# Allegro board ZB_TLSR8258_V101.brd
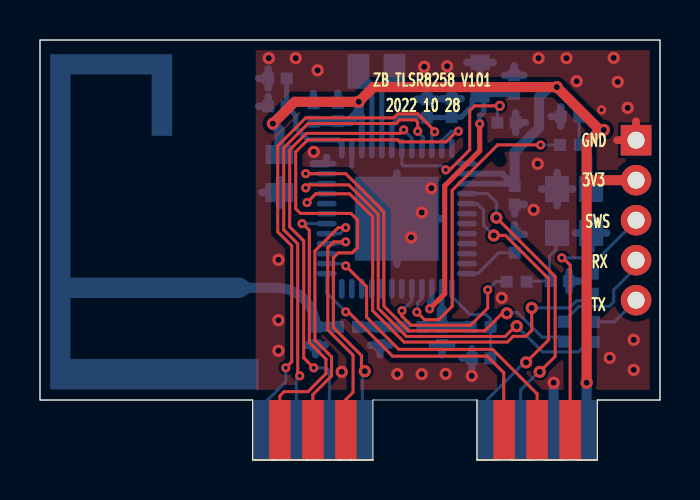
[diagram p0: board, top side]
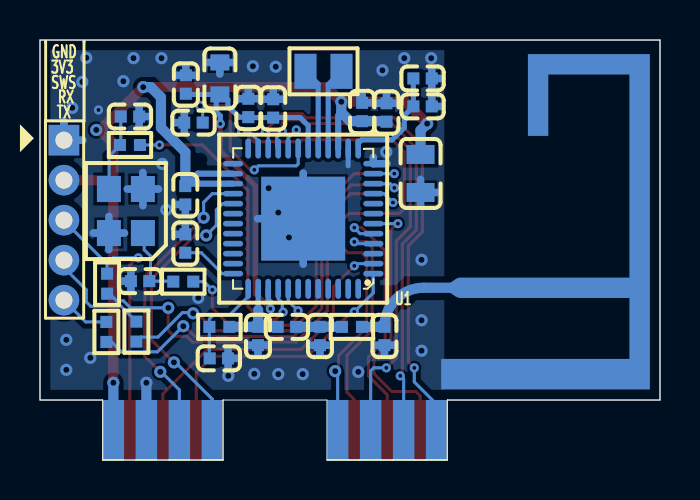
[diagram p1: board, bottom side, seen from below]

Outline 31 x 21 mm; copper layers: TOP, BOTTOM. Coordinates in mm from the lower left corner of the outline.
Outline path: 0,21 0,3 ; 0,21 31,21 ; 0,21 0,3 ; 0,21 31,21 ; 0,3 10.63,3 ; 0,3 10.63,3 ; 31,21 31,3 ; 31,21 31,3 ; 10.63,3 10.63,0 ; 10.63,3 10.63,0 ; 10.63,0 11.7,0 ; 10.63,0 11.7,0 ; 10.63,0 16.65,0 ; 11.7,0 12.28,0 ; 11.7,0 12.28,0 ; 12.28,0 13.35,0 ; 12.28,0 13.35,0 ; 13.35,0 13.93,0 ; 13.35,0 13.93,0 ; 13.93,0 15,0 ; 13.93,0 15,0 ; 15,0 15.58,0 ; 15,0 15.58,0 ; 15.58,0 16.65,0 ; 15.58,0 16.65,0 ; 16.65,0 16.65,3 21.85,3 ; 21.85,3 21.85,0 ; 21.85,3 21.85,0 ; 21.85,0 22.92,0 ; 21.85,0 27.87,0 ; 21.85,0 27.87,0 ; 27.87,0 26.8,0 ; 27.87,0 27.87,3 ; 27.87,0 27.87,3 ; 23.5,0 24.57,0 ; 25.15,0 26.22,0 ; 27.87,3 31,3 ; 27.87,3 31,3

## Placement (name value [footprint] x y rotation side)
C1  103  [C0402]  23.71 18.77 270 bottom
C2  2.2uF/10V  [C0603]  22.01 19.08 90 bottom
C3  12pF/50V  [C0402]  26.5 17.17 180 bottom
C4  12pF/50V  [C0402]  25.99 8.94 0 bottom
C5  1.2pF/NP0/50V  [C0402]  20.1 6.2 270 bottom
C6  1.8pF/NP0/50V  [C0402]  17 6.2 270 bottom
C7  1pF/NP0/50V  [C0402]  13.78 6.2 90 bottom
C8  220pF/NP0/50V  [C0402]  18.65 6.66 0 bottom
C9  18pF/NP0/50V  [C0402]  22.06 5.08 0 bottom
C10  105  [C0402]  23.73 10.82 90 bottom
C11  100pF  [C0402]  14.89 17.4 90 bottom
C12  104  [C0402]  13.67 17.38 90 bottom
C13  10uF/16V  [C0805]  11.97 14.33 270 bottom
C14  105  [C0402]  11.87 19.08 180 bottom
C15  103  [C0402]  11.87 17.68 0 bottom
C16  104  [C0402]  23.73 13.24 270 bottom
C17  104  [C0402]  20.58 17.6 90 bottom
C18  105  [C0402]  19.34 17.58 270 bottom
C19  105  [C0402]  23.33 16.87 180 bottom
J1  VCC3V3  [ZB_PIN1]  27.33 1.5 180 bottom
J2  GND  [ZB_PIN1]  25.68 1.5 180 bottom
J3  PWM1  [ZB_PIN1]  24.03 1.5 180 bottom
J4  PWM2  [ZB_PIN1]  22.38 1.5 180 bottom
J5  ZB_CONFIG  [ZB_PIN1]  16.12 1.5 180 bottom
J6  I/O1  [ZB_PIN1]  14.47 1.5 180 bottom
J7  I/O2  [ZB_PIN1]  12.82 1.5 180 bottom
J8  I/O3  [ZB_PIN1]  11.17 1.5 180 bottom
J9  I/O4  [ZB_PIN1]  11.99 1.5 0 top
J10  I/O5  [ZB_PIN1]  13.64 1.5 0 top
J11  I/O6  [ZB_PIN1]  15.29 1.5 0 top
J12  TX  [ZB_PIN1]  23.21 1.5 0 top
J13  RX  [ZB_PIN1]  24.86 1.5 0 top
J14  SWS  [ZB_PIN1]  26.51 1.5 0 top
J15  -  [SIP5_PH200]  29.8 11.99 270 bottom
L1  47uH  [L0806]  16.82 19.43 180 bottom
NOREF  -  []  31 3 90 top
NOREF#2  -  []  0 21 0 top
NOREF#3  -  []  27.87 0 90 top
R1  0  [R0402]  26.5 15.75 180 bottom
R2  0  [R0402]  23.83 8.92 0 bottom
R3  3.3nH  [R0402]  15.4 6.66 0 bottom
R4  1.3nH  [R0402]  22.03 6.66 180 bottom
R6  100R  [R0402]  27.64 8.82 270 bottom
R7  100R  [R0402]  26.18 6.42 270 bottom
R8  100R  [R0402]  27.68 6.4 270 bottom
U1  TLSR8258F512ET48  [ZB_QFN_7X7_48PIN_0P5_4P20X4P20]  17.84 12.07 0 bottom
Y1  24M_3225  [Y_SMCE3225]  26.7 12.45 90 bottom

## Library data of the parts
C1-C10 C12-C19 = C: room: ZB02
C11 = C: room: PWR
J1-J14 = JAC_1P-39008278002
J15 = JH4S_PH254_TJC3-4A_10: Tolerance: RichardLC
L1 = L: room: ZB02
R1-R4 = R: room: ZB02
R6-R8 = R
U1 = TLSR8258F512ET48: room: ZB02
Y1 = 24M_3225: room: ZB02

## Footprints (pads in the part's own frame, mm; a bottom-side part is the same pattern mirrored in y, then rotated)
C0402
  rect 0.6x0.6 smd: 1(-0.46,0) 2(0.46,0)
C0603
  rect 0.8x0.95 smd: 1(-0.8,0) 2(0.8,0)
C0805
  rect 0.95x1.4 smd: 1(-0.95,0) 2(0.95,0)
L0806
  rect 1.1x1.75 smd: 1(-0.9,0) 2(0.9,0)
R0402
  rect 0.6x0.6 smd: 1(-0.5,0) 2(0.5,0)
SIP5_PH200
  rect 1.53x1.53 hole 0.85: 1(-4,0)
  round 1.53 hole 0.85: 2(-2,0) 3(0,0) 4(2,0) 5(4,0)
Y_SMCE3225
  rect 1.3x1.2 smd: 1(-1.1,-0.85) 2(1.1,-0.85) 3(1.1,0.85) 4(-1.1,0.85)
ZB_PIN1
  rect 1.07x3 smd: 1(0,0)
ZB_QFN_7X7_48PIN_0P5_4P20X4P20
  oval 1x0.28 smd: 1(-3.507,2.75) 2(-3.507,2.25) 3(-3.507,1.75) 4(-3.507,1.25) 5(-3.507,0.75) 6(-3.507,0.25) 7(-3.507,-0.25) 8(-3.507,-0.75) 9(-3.507,-1.25) 10(-3.507,-1.75) 11(-3.507,-2.25) 12(-3.507,-2.75) 25(3.507,-2.75) 26(3.507,-2.25) 27(3.507,-1.75) 28(3.507,-1.25) 29(3.507,-0.75) 30(3.507,-0.25) 31(3.507,0.25) 32(3.507,0.75) 33(3.507,1.25) 34(3.507,1.75) 35(3.507,2.25) 36(3.507,2.75)
  oval 0.28x1 smd: 13(-2.75,-3.507) 14(-2.25,-3.507) 15(-1.75,-3.507) 16(-1.25,-3.507) 17(-0.75,-3.507) 18(-0.25,-3.507) 19(0.25,-3.507) 20(0.75,-3.507) 21(1.25,-3.507) 22(1.75,-3.507) 23(2.25,-3.507) 24(2.75,-3.507) 37(2.75,3.507) 38(2.25,3.507) 39(1.75,3.507) 40(1.25,3.507) 41(0.75,3.507) 42(0.25,3.507) 43(-0.25,3.507) 44(-0.75,3.507) 45(-1.25,3.507) 46(-1.75,3.507) 47(-2.25,3.507) 48(-2.75,3.507)
  rect 4.2x4.2 smd: 49(0,0)

## Nets
GND: C1.1 C2.2 C3.2 C4.2 C5.2 C6.2 C7.1 C9.1 C10.2 C11.2 C12.2 C13.2 C14.2 C15.1 C16.2 C17.2 C18.1 C19.1 J2.1 J15.1 U1.12(DVSS#12) U1.14(DVSS#14) U1.49(GND) Y1.2 Y1.4
VCC3V3: C11.1 C12.1 C13.1 C16.1 J1.1 J15.2 U1.15(VDD_IO) U1.26(VDD3) U1.27(VDDIO_AMS)
VDDA1V2: C1.2 C2.1 C17.1 C18.2 U1.18(VDD1V2) U1.39(AVDD1V2)
/M4_RST: C10.1 U1.36(RESETB)
I/O1: J6.1 U1.20(P5/UCTS/CYC2LNA/B[2])
I/O2: J7.1 U1.21(P0N/URTS/CYC2PA/B[3])
I/O3: J8.1 U1.22(SDMP0/P4/B[4])
I/O4: J9.1 U1.6(CK/URTS/P2/A[4])
I/O5: J10.1 U1.5(DI/UCTS/P1/A[3])
I/O6: J11.1 U1.4(DO/UTX/P0/A[2])
PWM1: J3.1 U1.28(I2CSDA/P4N/URTS/PGAP0/C[0])
PWM2: J4.1 U1.29(I2CCK/P1N/P0/PGAN0/C[1])
RX: J13.1 U1.2(DMIC_DI/P0N/URX/A[0])
SWS: R6.2 U1.9(SWS/URTS/A[7])
SWS_DEBUG: J14.1 J15.3 R6.1
TX: J12.1 U1.1(CK/I2SBCK/7816TRX/D[7])
UART0_RX: R7.2 U1.11(P4/UTX/ATSEL2/B[1])
UART0_TX: R8.2 U1.10(P3/URX/ATSEL1/B[0])
XTAL1: R2.1 U1.41(XC2)
XTAL2: R1.2 U1.40(XC1)
ZB_CONFIG: J5.1 U1.23(SDMN0/P5/B[5])
N76682: C19.2 U1.19(VDD_F)
N76758: L1.1 U1.17(VDCDC)
N76762: L1.2 U1.16(VDCDC_SW)
N76792: C6.1 C8.1 R3.2
N76796: C5.1 C8.2 R4.2 U1.38(ANT)
N76808: C9.2 R4.1 U1.37(VANT)
N76860: C7.2 R3.1
N77656: C14.1 C15.2 U1.13(VDD1V)
N79833: C4.1 R2.2 Y1.1
N79893: C3.1 R1.1 Y1.3
N104826: J15.4 R7.1
N104836: J15.5 R8.1

Pads without a net: U1 3 7 8 24 25 30 31 32 33 34 35 42 43 44 45 46 47 48

## Via types
v1: diameter 0.457, hole 0.203, TOP to BOTTOM, 24 vias
v2: diameter 0.61, hole 0.305, TOP to BOTTOM, 43 vias
v3: diameter 0.508, hole 0.254, TOP to BOTTOM, 1 via

## Routing (per net, layer and track width the routed paths; a pad name or vN(x,y) marks a point on that pad's centre or on a via; arc(x,y) is an arc through that point)
GND: length 47.6
  TOP w0.381: 29.8,16.93 J15.1 28.86,15.99
  BOTTOM w0.254: U1.14 15.59,14.71
  BOTTOM w0.381: 25.08,13.55 Y1.2 ; Y1.2 25.86,14.38 ; Y1.2 26.63,13.55 ; Y1.2 25.86,12.72 ; 11.41,18.6 C14.2 ; C14.2 11.41,19.56 ; C14.2 10.93,19.08 ; 25.56,17.17 C3.2 ; C3.2 26.04,16.69 ; C3.2 26.04,17.65 ; C4.2 26.45,9.42 ; C4.2 26.45,8.46 ; C4.2 26.93,8.94 ; 13.2,17.84 C12.2 ; C12.2 14.15,17.84 ; C12.2 13.67,18.31 ; 18.86,18.04 C18.1 ; C18.1 19.82,18.04 ; C18.1 19.34,18.52 ; 21.12,5.08 C9.1 ; C9.1 21.6,5.56 ; C9.1 21.6,4.6 ; 14.89,18.34 C11.2 14.42,17.86 ; C19.1 24.26,16.87 ; C19.1 23.79,16.39 ; C19.1 23.79,17.35 ; 16.52,5.74 C6.2 ; C6.2 17,5.26 ; C6.2 17.48,5.74 ; 21.35,19.88 C2.2 ; C2.2 22.01,19.3 ; C2.2 22.66,19.88 ; 23.73,12.3 C16.2 24.21,12.78 ; 13.78,5.26 C7.1 ; C7.1 13.3,5.74 ; C7.1 14.25,5.74 ; 11.41,18.16 C15.1 10.93,17.68 ; C17.2 20.58,18.54 ; C17.2 20.11,18.06 ; C17.2 21.06,18.06 ; 13.66,14.82 U1.12 14.33,15.14 ; C1.1 24.19,19.23 ; C1.1 23.23,19.23 ; C1.1 23.71,19.71 ; C13.2 11.97,14.03 ; C13.2 11.1,13.38 ; C13.2 11.97,12.72 ; 26.78,11.35 Y1.4 ; Y1.4 27.55,10.52 ; Y1.4 27.55,12.18 ; Y1.4 28.33,11.35 ; U1.49 20.12,12.07 ; U1.49 17.84,14.35 ; U1.49 17.84,9.79 ; 28.86,15.99 J15.1 29.8,16.93 ; 20.1,5.26 C5.2 ; C5.2 19.62,5.74 ; C5.2 20.58,5.74 ; 23.73,11.76 C10.2 24.21,11.28
  BOTTOM w0.508: 10.5,8.61 11.8,8.61 ; J2.1 v2(25.68,3.86)
  vias: v1(28.08,17.5) v2(11.44,20.09) v2(11.92,10.01) v2(11.92,6.99) v2(11.92,5.46) v2(12.79,20.09) v2(13.69,15.41) v2(13.88,19.48) v2(15.09,4.41) v2(17.87,4.29) v2(18.55,11.13) v2(19.09,12.37) v2(19.08,4.29) v2(19.21,19.66) v2(19.57,13.59) v2(20.29,4.31) v2(20.36,19.69) v2(21.59,4.21) v2(23.09,8.11) v2(24.69,12.51) v2(24.93,20.09) v2(24.89,14.81) v2(26.32,20.09) v2(26.83,18.94) v2(28.49,5.11) v2(28.69,20.11) v2(28.89,18.91) v2(29.39,17.61) v2(29.69,6.01) v2(29.69,4.51)
VCC3V3: length 53.4
  TOP w0.508: 27.33,13.96 v2(27.33,3.86) ; 27.33,13.96 27.36,13.99 J15.2 ; 27.33,13.96 27.33,15.83 28.01,16.5 ; v2(11.64,16.82) 12.74,17.91 v2(15.94,17.91) 16.67,18.65 v2(25.84,18.65) 27.98,16.5 28.01,16.5 ; 28.01,16.5 v2(28.19,16.5)
  BOTTOM w0.305: U1.15 16.09,17.22 15.94,17.37 ; U1.26 23.11,14.32 23.61,13.82 ; U1.27 23.61,13.82 ; 23.61,13.82 C16.1
  BOTTOM w0.508: v2(11.64,16.82) 11.97,16.49 C13.1 ; C12.1 13.7,16.94 C11.1 15.5,16.94 15.94,17.37 v2(15.94,17.91) ; v2(25.84,18.65) 25.46,18.65 24.95,18.14 24.95,16.61 23.73,15.39 C16.1 ; v2(27.33,3.86) J1.1
VDDA1V2: length 21.1
  TOP w0.254: v1(19.48,7.56) 20.24,8.32 20.24,13.71 21.99,15.46 v1(21.99,16.81)
  BOTTOM w0.254: v1(21.99,16.81) 21.99,17.21 22.19,17.41 22.19,18.1 C2.1 ; C2.1 21.87,18.28 21.6,18.01 21.6,17.69 21.05,17.14 C17.1 20.56,17.12 C18.2 19.34,17.12 17.99,17.12 17.59,16.72 U1.18 ; C2.1 23.67,18.28 C1.2 ; U1.39 19.59,8.56 19.59,8.02 19.48,7.91 v1(19.48,7.56)
/M4_RST: length 2.8
  BOTTOM w0.152: C10.1 22.93,10.36 21.89,9.32 U1.36
I/O1: length 22.4
  TOP w0.152: v1(13.69,4.61) 13.19,5.11 13.19,10.96 12.49,11.66 12.49,15.51 13.31,16.33 18.01,16.33 v1(18.19,16.51)
  BOTTOM w0.152: U1.20 18.59,16.1 v1(18.19,16.51) ; J6.1 14.47,4.45 14.32,4.61 v1(13.69,4.61)
I/O2: length 23.3
  TOP w0.152: v1(18.89,16.44) 18.89,16.89 18.77,17.01 17.99,17.01 17.8,16.83 13.4,16.83 12.19,15.61 12.19,11.51 12.89,10.81 12.89,4.31 v1(12.99,4.21)
  BOTTOM w0.152: J7.1 12.82,4.04 v1(12.99,4.21) ; v1(18.89,16.44) 18.89,16.41 19.17,16.12 19.17,15.65 U1.21
I/O3: length 24.9
  TOP w0.152: v1(19.73,16.41) 19.73,16.46 18.89,17.31 17.89,17.31 17.69,17.11 13.29,17.11 11.89,15.71 11.89,11.41 12.59,10.71 12.59,4.91 v1(12.29,4.61)
  BOTTOM w0.152: U1.22 19.59,16.27 v1(19.73,16.41) ; v1(12.29,4.61) 12.29,3.9 11.17,2.79 J8.1
I/O4: length 13.7
  TOP w0.152: v1(13.1,11.82) 13.14,11.82 13.47,11.49 13.47,5.87 14.3,5.04 14.3,4.32 13.4,3.42 12.21,3.42 11.99,3.2 J9.1
  BOTTOM w0.152: v1(13.1,11.82) 13.42,11.82 U1.6
I/O5: length 12.8
  TOP w0.152: v1(15.29,11.62) 14.91,11.62 13.74,10.45 13.74,5.99 14.41,5.32 14.58,5.16 14.58,4.2 13.64,3.27 J10.1
  BOTTOM w0.152: U1.5 15,11.32 15.29,11.61 v1(15.29,11.62)
I/O6: length 11.8
  TOP w0.152: 15.29,10.9 v1(15.29,10.91) 14.69,10.91 14.39,10.61 14.39,6.5 15.65,5.24 15.65,3.38 15.29,3.02 J11.1
  BOTTOM w0.152: v1(15.29,10.91) 15.2,10.82 U1.4
PWM1: length 15
  TOP w0.152: v2(24.99,4.41) 25.76,5.18 25.76,9.18 v2(22.82,12.12)
  BOTTOM w0.152: J3.1 24.03,3.51 24.93,4.41 v2(24.99,4.41) ; U1.28 22.38,13.32 22.82,12.88 v2(22.82,12.12)
PWM2: length 15
  TOP w0.152: v2(22.69,11.23) 23.26,11.23 25.43,9.07 25.43,6 v2(24.3,4.88)
  BOTTOM w0.152: v2(22.69,11.23) 22.18,11.74 22.18,12.5 21.87,12.82 U1.29 ; J4.1 22.38,3.04 24.22,4.88 v2(24.3,4.88)
RX: length 15.9
  TOP w0.152: J13.1 24.86,3.3 22.63,5.53 17.94,5.53 16.33,7.14 16.33,8.66 v1(15.29,9.71)
  BOTTOM w0.152: U1.2 15.18,9.82 v1(15.29,9.71)
SWS: length 23.1
  TOP w0.152: v1(13.35,12.87) 13.79,13.31 15.48,13.31 16.63,12.16 16.63,7.47 18.2,5.9 23.37,5.9 23.66,6.18 24.29,6.18 24.59,6.48 v2(24.59,7.61)
  BOTTOM w0.152: U1.9 13.8,13.32 v1(13.35,12.87) ; v2(24.59,7.61) 26.48,7.61 26.83,7.96 27.17,7.96 27.53,8.32 R6.2
SWS_DEBUG: length 14.1
  TOP w0.152: v1(26.09,10.11) 26.15,10.11 26.51,9.75 J14.1
  BOTTOM w0.152: v1(26.09,10.11) 27.34,10.11 27.64,9.81 ; 27.64,9.81 R6.1 ; 27.64,9.81 29.8,11.97 J15.3
TX: length 14.3
  TOP w0.152: J12.1 23.21,1.63 23.19,1.65 23.19,4.36 22.36,5.19 17.63,5.19 15.41,7.41 v1(15.29,7.41)
  BOTTOM w0.152: v1(15.29,7.41) 14.33,8.36 U1.1
UART0_RX: length 20.9
  TOP w0.152: v2(23.34,7.34) 23.11,7.34 22.24,6.46 18.43,6.46 17.19,7.7 17.19,12.39 17.08,12.5 17.08,12.51 17.03,12.56 17.03,12.57 15.29,14.32 v1(13.29,14.32)
  BOTTOM w0.152: R7.2 25.96,6.14 25.1,6.14 23.88,7.37 23.37,7.37 v2(23.34,7.34) ; U1.11 v1(13.29,14.32)
UART0_TX: length 22.4
  TOP w0.152: v1(13.29,13.61) 13.43,13.75 15.44,13.75 16.8,12.39 16.8,12.39 16.91,12.28 16.91,7.58 18.32,6.18 23.26,6.18 23.77,6.69 v2(23.84,6.69)
  BOTTOM w0.152: U1.10 13.5,13.82 v1(13.29,13.61) ; v2(23.84,6.69) 23.85,6.69 25.13,5.41 26.93,5.41 27.42,5.9 R8.2
XTAL1: length 8.4
  TOP w0.152: v1(22.39,8.51) 22.39,7.59 21.53,6.74 18.55,6.74 18.1,7.19 v1(18.1,7.46)
  BOTTOM w0.152: v1(22.39,8.51) 22.8,8.92 R2.1 ; U1.41 18.59,8.27 18.59,8.27 18.59,7.95 v1(18.1,7.46)
XTAL2: length 15.6
  TOP w0.152: v1(25.03,15.75) 25.02,15.75 22.88,15.75 20.61,13.48 20.61,7.69 19.94,7.02 19.22,7.02 v1(18.84,7.4)
  BOTTOM w0.152: R1.2 v1(25.03,15.75) ; U1.40 19.09,8.07 18.89,7.86 18.89,7.44 v1(18.84,7.4)
ZB_CONFIG: length 28.3
  TOP w0.152: v1(20.92,16.44) 20.84,16.44 20.31,15.91 17.99,15.91 17.89,16.01 13.39,16.01 12.79,15.41 12.79,12.57 13.02,12.33 15.55,12.33 15.88,12 15.88,10.62 15.61,10.36 14.9,10.36 14.67,10.12 14.67,6.63 16.07,5.22 16.07,4.61 v2(16.24,4.44)
  BOTTOM w0.152: v1(20.92,16.44) 20.91,16.43 20.56,16.43 20.09,15.96 U1.23 ; J5.1 16.12,4.32 v2(16.24,4.44)
N76682: length 9.2
  TOP w0.152: v3(22.99,17.71) 21.73,17.71 21.49,17.46 21.49,15.51 20.49,14.51 v1(20.29,14.51)
  BOTTOM w0.152: C19.2 22.87,17.59 v3(22.99,17.71) ; v1(20.29,14.51) 20.09,14.71 18.19,14.71 18.09,14.8 U1.19
N76758: length 4.1
  BOTTOM w0.254: U1.17 17.09,18.8 L1.1
N76762: length 4.1
  BOTTOM w0.254: U1.16 16.59,18.77 L1.2
N76792: length 2.3
  BOTTOM w0.508: R3.2 15.9,6.66 C6.1 17,6.66 C8.1
N76796: length 4.3
  BOTTOM w0.254: U1.38 20.09,7.51
  BOTTOM w0.508: C8.2 19.12,6.66 C5.1 ; 20.09,7.51 20.09,6.67 C5.1 ; C5.1 21.53,6.66 R4.2
N76808: length 4.8
  BOTTOM w0.152: U1.37 20.59,8.17 21.5,7.27 22.31,7.27 22.53,7.05 R4.1 22.53,5.1 C9.2
N76860: length 4.2
  BOTTOM w0.508: R3.1 13.78,6.66 C7.2 arc(13.2,8.04) 11.82,8.61
N77656: length 5.5
  BOTTOM w0.254: C14.1 C15.2 12.79,17.23 12.79,16.61 13.4,16 14.92,16 15.09,15.83 U1.13
N79833: length 3.8
  BOTTOM w0.152: R2.2 24.36,8.94 C4.1 25.47,9 25.47,10.19 25.79,10.51 25.79,11.28 Y1.1
N79893: length 3.9
  BOTTOM w0.152: Y1.3 27.54,13.56 27.54,15.19 27,15.73 R1.1 26.96,15.79 C3.1
N104826: length 5.5
  BOTTOM w0.152: R7.1 26.95,7.68 28.46,7.68 28.69,7.91 28.69,8.51 29.82,9.64 29.82,9.98 J15.4
N104836: length 2.6
  BOTTOM w0.152: R8.1 28.72,6.9 J15.5

## Copper pours and planes (outline as drawn; the poured copper is in the pictures)
GND on BOTTOM (solid shape): 6.6,16.21 5.59,16.21 5.59,19.28 1.52,19.28 1.52,9.12 10.01,9.12 10.14,9.08 10.25,9.02 10.55,8.82 10.55,8.4 10.4,8.3 10.25,8.2 10.15,8.14 10.04,8.11 9.99,8.1 9.94,8.1 1.52,8.1 1.52,5.05 10.94,5.05 10.94,3.53 0.51,3.53 0.51,20.29 6.6,20.29
GND on TOP: 10.79,3.51 10.79,20.49 30.49,20.49 30.49,3.51 28.1,3.51 28.1,3.51 ; 8 cut-outs
GND on BOTTOM: 10.79,3.51 10.79,8.11 11.79,8.11 11.79,9.11 10.79,9.11 10.79,20.49 30.49,20.49 30.49,3.51 28.1,3.51 28.1,3.51 ; 6 cut-outs

## Text on the board
Ref Des/Silkscreen Bottom: RX | TX | GND | SWS | 3V3
Ref Des/Silkscreen Top: ZB TLSR8258 V101 | 2022 10 28 | GND | 3V3 | SWS | TX | RX
User.11: FIGURE | SIZE | 0.2032 | 0.254 | 0.3048 | 0.85 | DRILL CHART: TOP to BOTTOM | ALL UNITS ARE IN MILLIMETERS | PLATED | QTY | 25 | 1 | 43 | 5
